# Altium PCB BatteryMaster.PcbDoc
Units mm, origin at the board's own origin, x right, y up, seen from the top; angles counter-clockwise.
Board outline 82.66 x 56.61 mm, 2 copper layers (Top Layer, Bottom Layer); 93 components, 122 nets, 358 pads, 55 vias.
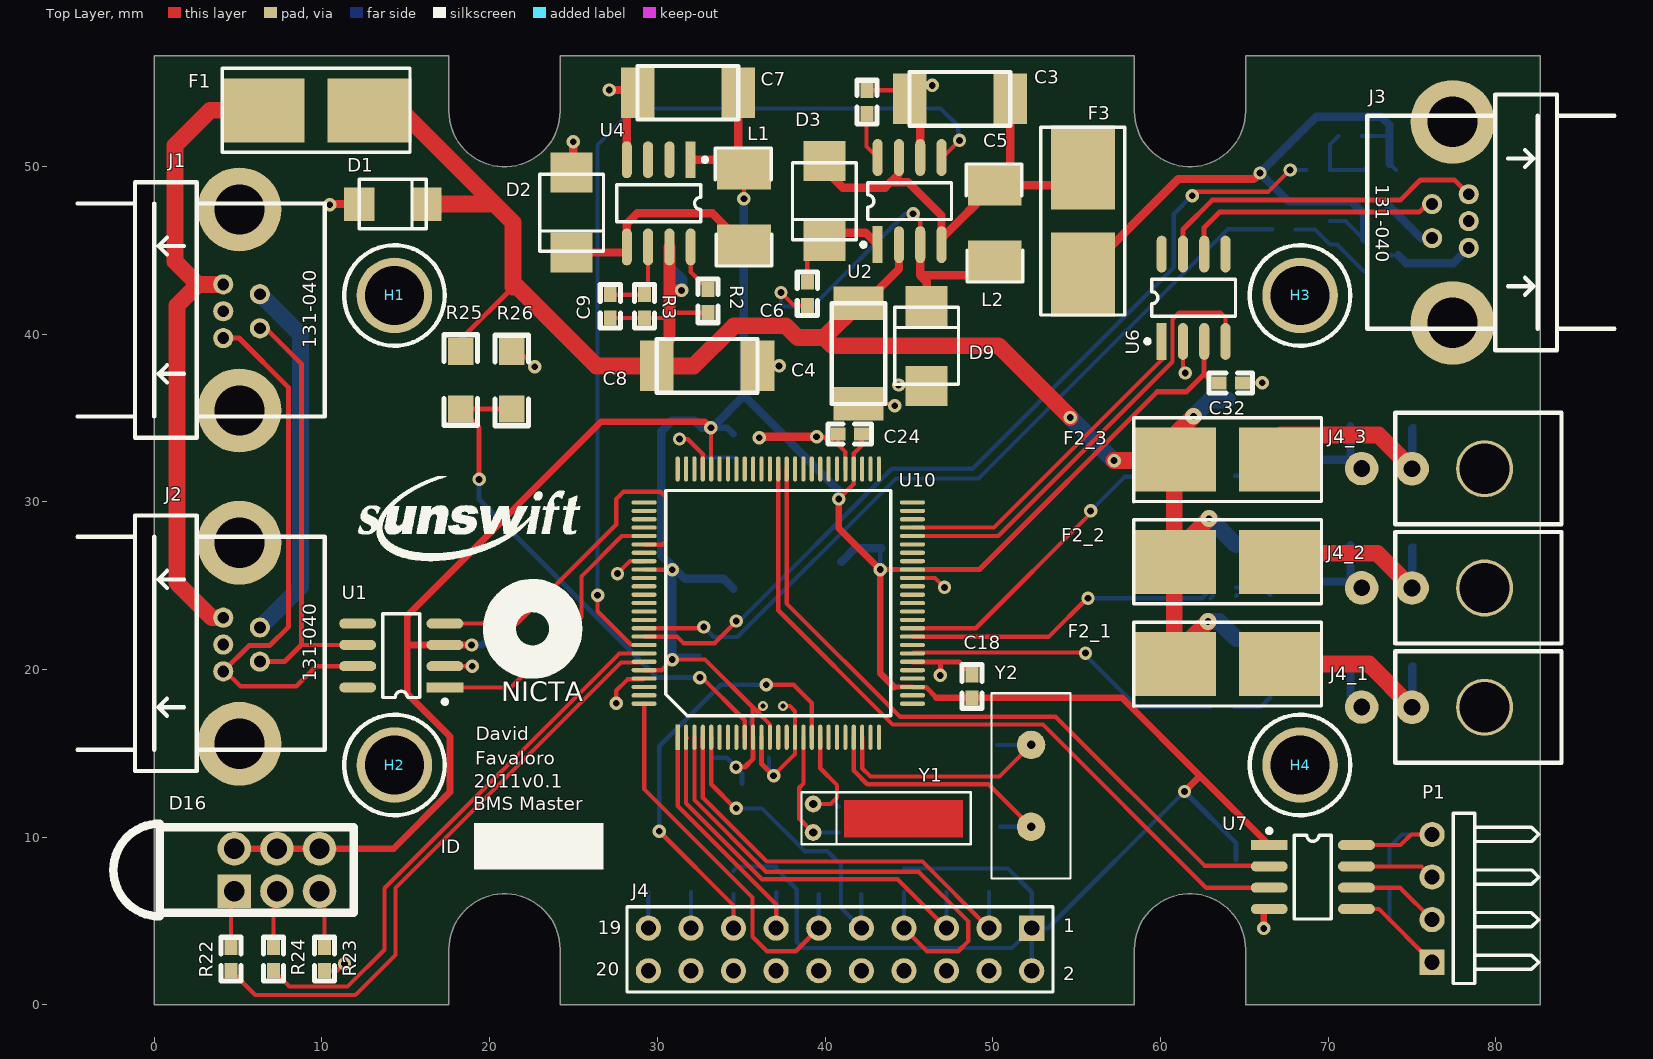
[diagram p0: Top Layer view]
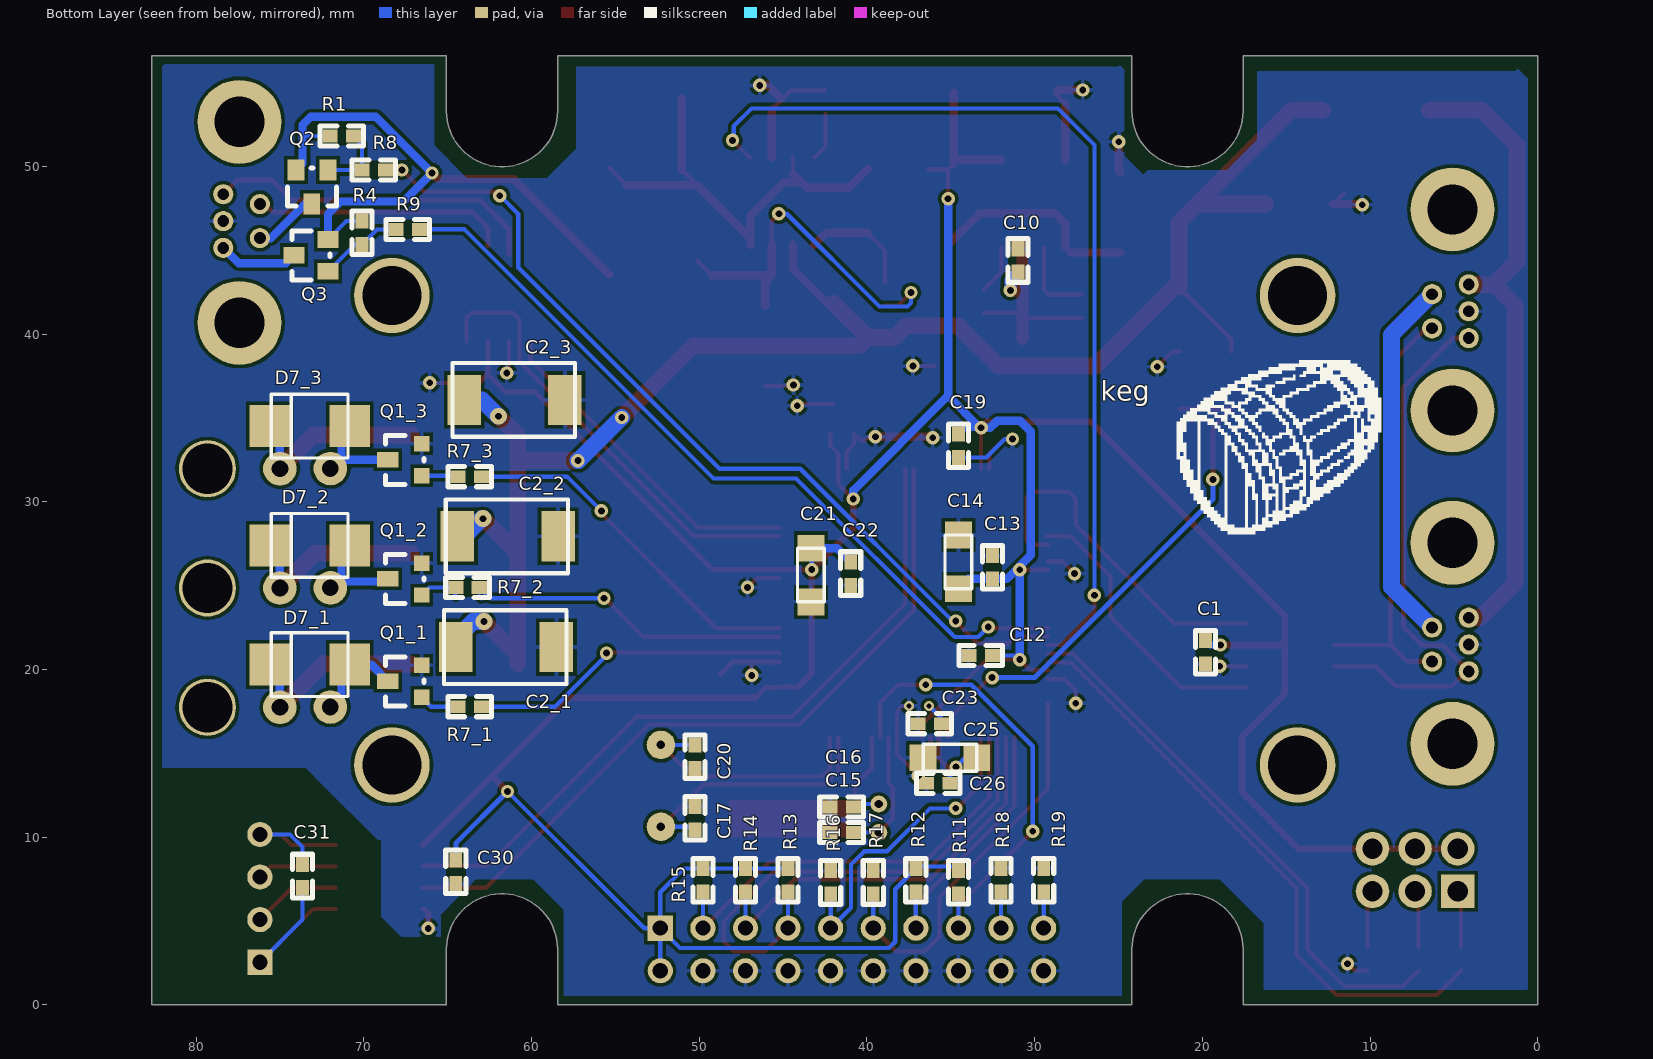
[diagram p1: Bottom Layer view, seen from below]

## Layer stack, top to bottom
Top Layer: signal copper 0.0356
Dielectric: dielectric 0.32, FR-4, Dk 4.8
Bottom Layer: signal copper 0.0356

## Board outline
17.575,0 17.575,3.31 cw(c20.89,3.31) 24.205,3.31 24.205,0 58.445,0 58.445,3.31 cw(c61.76,3.31) 65.075,3.31 65.075,0 65.08,-0.005 82.655,-0.005 82.655,56.605 82.65,56.6 65.075,56.6 65.075,53.29 cw(c61.76,53.29) 58.445,53.29 58.445,56.6 24.205,56.6 24.205,53.29 cw(c20.89,53.29) 17.575,53.29 17.575,56.605 -0.005,56.605 -0.005,-0.005 0,0

## Design rules (kind name [scope] priority, off if disabled: settings)
Clearance [All] p1: gap=0.2
ComponentClearance [All] p1 off: gap=0.254 collisioncheckmode=3 verticalgap=0.254 showdistances=FALSE
HoleSize [All] p1 off: absolutevalues=TRUE maxlimit=2.54 minlimit=0.025 maxpercent=80.000 minpercent=20.000
MinimumSolderMaskSliver [All] p1 off: minsoldermaskwidth=0.254
PolygonConnect [All] p1: connectstyle=Relief reliefconductorwidth=0.254 reliefentries=4 polygonreliefangle="90 Angle"
RoutingVias [All] p1: holewidth=0.2 width=0.4 viastyle="Through Hole" minholewidth=0.2 minwidth=0.4 maxholewidth=0.8 maxwidth=1
SilkToSilkClearance [All] p1 off: silktosilkclearance=0.254
SilkscreenOverComponentPads [All] p1 off: minsilkscreentomaskgap=0.254
SolderMaskExpansion [All] p1: expansion=0.102
TestPointUsage [All] p1: valid=0 allowmultiple=FALSE
Testpoint [All] p1: side=15 testpointundercomponent=TRUE minsize=1.016 maxsize=2.54 preferedsize=1.524 minholesize=0 maxholesize=1.016 preferedholesize=0.813 testpointgrid=0.025 style=1023 order=0123456789
Width [All] p1: maxlimit=1 minlimit=0.254 preferedwidth=0.254
19 further rules are at their usual default settings.

## Classes and differential pairs
channel class Switched_Outputs: 1 2 3
component class "Unisolated CAN": C1 D1 F1 J1 J2 U1
component class U_LPC1768: C12 C13 C14 C15 C16 C17 C18 C19 C20 C21 C22 C23 C24 C25 C26 J4 R11 R12 R13 R14 R15 R16 R17 R18 R19 U10 Y1 Y2
component class U_3V-Switcher-50mA: C7 C8 C9 C10 D2 L1 R2 R3 U4
component class TopLevel: C30 C31 C32 D4 D5 D6 D16 F3 H1 H2 H3 H4 J3 P1 Q2 Q3 R1 R4 R8 R9 R22 R23 R24 R25 R26 U6 U7 Z1
component class 2: C2_2 D3_2 D7_2 F2_2 J4_2 Q1_2 R5_2 R6_2 R7_2
component class 3: C2_3 D3_3 D7_3 F2_3 J4_3 Q1_3 R5_3 R6_3 R7_3
component class 5V-switcher: C3 C4 C5 C6 D3 D9 L2 U2
component class 1: C2_1 D3_1 D7_1 F2_1 J4_1 Q1_1 R5_1 R6_1 R7_1

## Components (designator, comment, footprint, x,y, rotation, side; value= is the part's Value field where it differs from the comment)
C1 "100nF" 0603 19.812,20.32 r90 bottom
C2_1 "100uF 35V" MCCT-CASED 64.516,21.336 r180 bottom (schematic designator C2)
C2_2 "100uF 35V" MCCT-CASED 64.42,27.94 r180 bottom (schematic designator C2)
C2_3 "100uF 35V" MCCT-CASED 64.008,36.068 r180 bottom (schematic designator C2)
C3 "100uF 35V" MCCT-CASEC 51.042,54.025 r180 top
C4 "10uF 35V" MCCT-CASEC 41.994,41.833 r270 top
C5 "3.3nF" 0603 42.502,54.533 r270 top
C6 "100nF" 0603 38.946,41.706 r90 top
C7 "4u7 35V" MCCT-CASEC 34.824,54.388 r180 top
C8 "4u7 35V" MCCT-CASEC 29.972,38.1 r0 top
C9 "1n" 0603 27.197,40.952 r90 top
C10 "100nF" 0603 30.988,43.688 r90 bottom
C12 "100nF" 0603 33.909,20.828 r180 bottom
C13 "100nF" 0603 32.512,25.4 r90 bottom
C14 "10uF" MCCT-CASEA 34.544,26.416 r90 bottom
C15 "18pF" 0603 40.813,10.278 r0 bottom
C16 "18pF" 0603 40.813,11.802 r0 bottom
C17 "18pF" 0603 50.253,10.419 r90 bottom
C18 "100nF" 0603 48.768,18.288 r90 top
C19 "100nF" 0603 34.544,32.639 r90 bottom
C20 "18pF" 0603 50.253,15.499 r270 bottom
C21 "10uF" MCCT-CASEA 43.341,25.631 r270 bottom
C22 "100nF" 0603 40.972,25.016 r90 bottom
C23 "100nF" 0603 35.56,16.764 r0 bottom
C24 "100nF" 0603 40.767,34.036 r0 top
C25 "10uF" MCCT-CASEA 35.052,14.732 r0 bottom
C26 "100nF" 0603 35.052,13.208 r0 bottom
C30 "100nF" 0603 64.516,7.239 r90 bottom
C31 "100nF" 0603 73.66,8.382 r270 bottom
C32 "100nF" 0603 64.897,37.084 r180 top
D1 "12V Transient Suppressor" SMA 14.224,47.752 r0 top
D2 "MBRS130" SMB 24.892,47.244 r270 top
D3 "1N914" SMB 39.962,47.929 r270 top
D7_1 "15V" SMB 73.232,20.284 r0 bottom (schematic designator D7)
D7_2 "15V" SMB 73.232,27.396 r0 bottom (schematic designator D7)
D7_3 "15V" SMB 73.232,34.508 r0 bottom (schematic designator D7)
D9 "MBRS130" SMB 46.058,39.293 r90 top
D16 "1882-2781" LED_TRILEVEL 4.775,6.77 r90 top
F1 "125mA/3A" LITTELFUSE-154 9.652,53.34 r0 top
F2_1 "Fuse" LITTELFUSE-154 64.008,20.32 r0 top (schematic designator F2)
F2_2 "Fuse" LITTELFUSE-154 64.008,26.416 r0 top (schematic designator F2)
F2_3 "Fuse" LITTELFUSE-154 64.008,32.512 r0 top (schematic designator F2)
F3 "125mA/3A" LITTELFUSE-154 55.372,46.736 r90 top
H1 "HOLE" M2.5 14.325,42.3 r0 top
H2 "HOLE" M2.5 14.325,14.3 r0 top
H3 "HOLE" M2.5 68.325,42.3 r0 top
H4 "HOLE" M2.5 68.325,14.3 r0 top
J1 "CON5-S" TRIAD5F 6.3,42.375 r90 top
J2 "CON5-S" TRIAD5F 6.3,22.5 r90 top
J3 "CON5-S" TRIAD5F 76.2,45.72 r270 top
J4 "ARM JTAG" HDR2X10 52.324,4.572 r180 top
J4_1 "CON2" MICROFIT-2 75.008,17.744 r90 top (schematic designator J4)
J4_2 "CON2" MICROFIT-2 75.008,24.856 r90 top (schematic designator J4)
J4_3 "CON2" MICROFIT-2 75.008,31.968 r90 top (schematic designator J4)
L1 "330uH" 1812 35.164,45.325 r90 top
L2 "10uH" 1812 50.122,44.373 r90 top
P1 "Header 4H" HDR1X4H 76.2,2.54 r90 top
Q1_1 "ZXM61N02F" SOT23(3) 66.548,18.339 r90 bottom (schematic designator Q1)
Q1_2 "ZXM61N02F" SOT23(3) 66.548,24.435 r90 bottom (schematic designator Q1)
Q1_3 "ZXM61N02F" SOT23(3) 66.548,31.547 r90 bottom (schematic designator Q1)
Q2 "ZXM61P03F" SOT23-3 72.136,49.784 r0 bottom
Q3 "ZXM61P03F" SOT23-3 72.136,43.739 r90 bottom
R1 "10K" 0603 70.612,51.816 r0 bottom
R2 "100k" 0603 33.02,42.672 r270 top
R3 "1R2" 0603 29.229,40.952 r90 top
R4 "10K" 0603 70.104,45.339 r90 bottom
R7_1 "100R" 0603 62.992,17.78 r0 bottom (schematic designator R7)
R7_2 "100R" 0603 63.119,24.892 r0 bottom (schematic designator R7)
R7_3 "100R" 0603 62.992,31.496 r0 bottom (schematic designator R7)
R8 "100" 0603 68.707,49.784 r0 bottom
R9 "100" 0603 66.675,46.228 r0 bottom
R11 "10k" 0603 34.544,6.604 r90 bottom
R12 "10k" 0603 37.084,6.731 r90 bottom
R13 "10k" 0603 44.704,6.731 r90 bottom
R14 "10k" 0603 47.244,6.731 r90 bottom
R15 "10k" 0603 49.784,6.731 r90 bottom
R16 "10k" 0603 42.164,8.001 r270 bottom
R17 "10k" 0603 39.624,8.001 r270 bottom
R18 "10k" 0603 32.004,8.128 r270 bottom
R19 "10k" 0603 29.464,8.128 r270 bottom
R22 "1K" 0603 4.572,2.032 r90 top
R23 "1K" 0603 7.112,2.032 r90 top
R24 "1K" 0603 10.16,2.032 r90 top
R25 "100k" 1206 18.28,38.958 r270 top
R26 "20K" 1206 21.328,35.529 r90 top
U1 "SN65HVD232" SO8 14.732,20.828 r90 top
U2 "LT1376" SO8 45.042,47.929 r0 top
U4 "LTC1474" SO8 30.084,47.793 r180 top
U6 "SN65HVD232" SO8 61.976,42.164 r0 top
U7 "IL712" SO8 69.088,7.62 r270 top
U10 "LPC1768" QFP100 31.212,15.957 r90 top
Y1 "32.768 KHz" WATCHA 39.289,11.978 r270 top
Y2 "12 MHz" HC49/4H 52.285,7.534 r90 top

## Footprints (in the part's own frame and the unit in brackets; to place one, negate y for a bottom-side part, rotate by r counter-clockwise, add the part's x,y. Pads: shape width x height; smd on the part's side, far side on the other; paste and mask are expansions set on the pad)
0603 [mil]
  rect 35.43x30 smd: 1(0,0) 2(55,0)
  silkscreen extent -24,-24 79,24
1206 [mil]
  rect 62.99x60 smd: 1(0,0) 2(135,0)
  silkscreen extent -39,-39 173,39
1812 [mm]
  rect 2.4x3.2 smd: 1(0,0) 2(4.5,0)
  silkscreen extent -1.27,-1.66 5.77,1.7
HC49/4H [mm]
  round 1.7 hole 0.5: 1(3.085,0) 2(7.965,0)
  silkscreen extent 0,-2.35 11.05,2.35
HDR1X4H [mm] "Connector; Header; 4 Position; Right Angle"
  rect 1.5x1.5 hole 0.9: 1(0,0)
  round 1.5 hole 0.9: 2(2.54,0) 3(5.08,0) 4(7.62,0)
  silkscreen extent -1.27,-6.35 8.89,-1.27
HDR2X10 [mm] "Connector; Header; 10x2 Position"
  rect 1.5x1.5 hole 0.9: 1(0,0)
  round 1.5 hole 0.9: 2(0,2.54) 3(2.54,0) 4(2.54,2.54) 5(5.08,0) 6(5.08,2.54) 7(7.62,0) 8(7.62,2.54) 9(10.16,0) 10(10.16,2.54) 11(12.7,0) 12(12.7,2.54) 13(15.24,0) 14(15.24,2.54) 15(17.78,0) 16(17.78,2.54) 17(20.32,0) 18(20.32,2.54) 19(22.86,0) 20(22.86,2.54)
  silkscreen extent -1.27,-1.27 24.13,3.81
LED_TRILEVEL [mm]
  rect 2x2 hole 1.2: 1(0,0)
  round 2 hole 1.2: 2(0,-2.54) 3(0,-5.08) 4(2.54,-5.08) 5(2.54,-2.54) 6(2.54,0)
  silkscreen extent -1.49,-7.11 4.03,7.21
LITTELFUSE-154 [mm]
  rect 5x3.81 smd: 1(-3.185,0) 2(3.185,0)
  silkscreen extent -5.6,-2.51 5.6,2.5
M2.5 [mm]
  round 4.5 hole 3.5: 1(0,0)
  silkscreen extent -3,-3 3,3
MCCT-CASEA [mm]
  rect 1.6x1.6 smd: 1(-1.6,0) 2(1.6,0)
  silkscreen extent -1.6,-0.8 1.6,0.8
MCCT-CASEC [mm]
  rect 2x3 smd: 1(0,0) 2(6,0)
  silkscreen extent 0,-1.6 6,1.6
MCCT-CASED [mm]
  rect 2x3 smd: 1(0,0) 2(6,0)
  silkscreen extent -0.7,-2.2 6.6,2.2
MICROFIT-2 [mm]
  round 3.4 hole 3: 0(0,-4.32)
  round 2 hole 1: 1(0,0) 2(0.01,3.01)
  silkscreen extent -3.31,-8.91 3.33,1.01
QFP100 [mm]
  rect 1.5x0.25 smd: 1(0,0)
  oval 1.5x0.25 smd: 2(0,-0.5) 3(0,-1) 4(0,-1.5) 5(0,-2) 6(0,-2.5) 7(0,-3) 8(0,-3.5) 9(0,-4) 10(0,-4.5) 11(0,-5) 12(0,-5.5) 13(0,-6) 14(0,-6.5) 15(0,-7) 16(0,-7.5) 17(0,-8) 18(0,-8.5) 19(0,-9) 20(0,-9.5) 21(0,-10) 22(0,-10.5) 23(0,-11) 24(0,-11.5) 25(0,-12) 51(16,-12) 52(16,-11.5) 53(16,-11) 54(16,-10.5) 55(16,-10) 56(16,-9.5) 57(16,-9) 58(16,-8.5) 59(16,-8) 60(16,-7.5) 61(16,-7) 62(16,-6.5) 63(16,-6) 64(16,-5.5) 65(16,-5) 66(16,-4.5) 67(16,-4) 68(16,-3.5) 69(16,-3) 70(16,-2.5) 71(16,-2) 72(16,-1.5) 73(16,-1) 74(16,-0.5) 75(16,0)
  oval 0.25x1.5 smd: 26(2,-14) 27(2.5,-14) 28(3,-14) 29(3.5,-14) 30(4,-14) 31(4.5,-14) 32(5,-14) 33(5.5,-14) 34(6,-14) 35(6.5,-14) 36(7,-14) 37(7.5,-14) 38(8,-14) 39(8.5,-14) 40(9,-14) 41(9.5,-14) 42(10,-14) 43(10.5,-14) 44(11,-14) 45(11.5,-14) 46(12,-14) 47(12.5,-14) 48(13,-14) 49(13.5,-14) 50(14,-14) 76(14,2) 77(13.5,2) 78(13,2) 79(12.5,2) 80(12,2) 81(11.5,2) 82(11,2) 83(10.5,2) 84(10,2) 85(9.5,2) 86(9,2) 87(8.5,2) 88(8,2) 89(7.5,2) 90(7,2) 91(6.5,2) 92(6,2) 93(5.5,2) 94(5,2) 95(4.5,2) 96(4,2) 97(3.5,2) 98(3,2) 99(2.5,2) 100(2,2)
  silkscreen extent 1.28,-12.71 14.71,0.72
SMA [mm]
  rect 1.8x2 smd: A(-2,0) K(2,0)
  silkscreen extent -2,-1.48 2,1.48
SMB [mm]
  rect 2.4x2.5 smd: A(-2.385,0) K(2.385,0)
  silkscreen extent -2.28,-1.9 2.3,1.9
SO8 [mm]
  rect 0.6x2.2 smd: 1(-1.905,-2.6)
  oval 0.6x2.2 smd: 2(-0.635,-2.6) 3(0.635,-2.6) 4(1.905,-2.6) 5(1.905,2.6) 6(0.635,2.6) 7(-0.635,2.6) 8(-1.905,2.6)
  silkscreen extent -2.88,-2.72 2.5,1.1
SOT23(3) [mil]
  rect 36x36 smd: 1(0,0) 2(75,0)
  rect 36x50 smd: 3(38,80)
  silkscreen extent -20,-5 95,85
SOT23-3 [mm]
  rect 1x1.25 smd: 1(0,0) 2(1.905,0) 3(0.965,2.032)
  silkscreen extent -0.51,-0.13 2.41,2.16
TRIAD5F [mm]
  round 5 hole 3: 0(-6.934,1.219) 0(5.055,1.219)
  round 1.2 hole 0.7: 1(0,0) 2(0.584,2.184) 3(-1.016,2.184) 4(-2.616,2.184) 5(-2.032,0)
  silkscreen extent -8.56,-3.86 6.68,10.87
WATCHA [mm]
  round 1 hole 0.5: 1(0,0) 2(1.7,0)
  Top Layer region: -0.25,1.85 2,1.85 2,8.95 -0.25,8.95
  silkscreen extent -0.7,-0.7 2.4,9.4

## Part data
C1 C5 C6 C9 C10 C12 C13 C15 C16 C17 C18 C19 C20 C22 C23 C24 C26 C30 C31 C32: library part CAP, "Capacitor"
C2_1 C2_2 C2_3 C3 C4 C7 C8: library part "Cap Pol3", "Polarized Capacitor (Surface Mount)"
C14 C21 C25: library part "CAP POL3", "Polarized Capacitor (Surface Mount)"
D1 D3 D7_1 D7_2 D7_3: library part DIODE, "Diode"
D2 D9: library part "D SCHOTTKY", "Schottky Diode"
D16: library part LED-TRILEVEL, "Three level LED"
F1 F3: library part FUSE2, "Fuse"
F2_1 F2_2 F2_3: library part FUSE
H1 H2 H3 H4: "Hole"
J1 J2 J3: "Connector, 2 pin, with shield @ S"
J4: library part "Header 10X2", "Header, 10-Pin, Dual row"
J4_1 J4_2 J4_3: "Connector"
L1 L2: library part Inductor, "Inductor"
P1: "Header, 4-Pin, Right Angle"
Q1_1 Q1_2 Q1_3: "1.7A, 20V N-Channel Enhancement mode FET"
Q2 Q3: "1.1A, 30V P-Channel Enhancement mode FET"
R1 R2 R3 R4 R8 R9 R11 R12 R13 R14 R15 R16 R17 R18 R19 R22 R23 R24: library part RES1, "Resistor"
R7_1 R7_2 R7_3 R25 R26: library part RES1
U1 U6: "3.3V CAN Transciever"
U4: "Step-down converter"
U7: "IL712 Optical Isolator"
U10: "NXP Cortex-M3 Microcontroller, 100pin 100MHz"
Y1 Y2: library part CRYSTAL, "Crystal"

## Free pads (board coordinates)
  round 1.981 on Top Overlay mask+0.2: 2(26.353,22.121)

## Via types
v1: diameter 0.8, hole 0.4, Top Layer to Bottom Layer, 46 vias
v2: diameter 1, hole 0.4, Top Layer to Bottom Layer, 3 vias
v3: diameter 0.6, hole 0.3, Top Layer to Bottom Layer, 2 vias
v4: diameter 0.8, hole 0.4, Top Layer to Bottom Layer, tented both sides, 2 vias
v5: diameter 0.8, hole 0.4, Top Layer to Bottom Layer, tented top, 1 vias
v6: diameter 0.8, hole 0.4, Top Layer to Bottom Layer, tented bottom, 1 vias

## Nets (pads, with @x,y where several pads share a name; then routed paths per layer and width w, separated by ;. In a path a pad name is that pad's centre, name@x,y a point inside that pad or via, vN(x,y) a via of type N, cw(c..) or ccw(c..) an arc to the next point about the centre after c; other vN are vias at no path point)
3V3: C1.2 C7.1 C12.2 C13.1 C14.1 C18.1 C19.2 C21.1 C22.2 C23.1 C24.2 C25.1 C26.1 C30.2 C32.2 D16.4 D16.5 D16.6 J4.1 J4.2 L1.2 R11.2 R12.2 R13.2 R14.2 R15.2 U1.3 U4.1 U6.3 U7.1 U10.10 U10.12 U10.28 U10.42 U10.54 U10.71 U10.84 U10.96 | length 264
  Top Layer w0.254: U10.96 30.263,19.957 v1(30.893,20.587) 32.846,20.587 35.955,17.479 ; U10.84@29.224,25.945 v1(30.893,25.945) ; U10.71@33.197,31.972 v1(33.197,34.408) ; L1.2@34.596,50.393 L1.2 ; v1(34.691,14.179) v1@34.733,14.221 ; L1.2@34.824,50.165 L1.2 ; v1(35.164,48.065) L1.2 ; 35.677,17.748 35.677,15.992 U10.10 U10.10@35.698,15.943 ; v3(36.289,17.814) 35.955,17.479 ; L1.2@36.31,49.825 L1.2 ; U10.12 36.712,16.721 35.955,17.479 ; v1(40.813,30.162) 41.712,31.061 U10.54 41.712,32.879 42.196,33.363 42.196,34.004 C24.2
  Top Layer w0.3: v1(34.691,14.179) 35.227,14.179 35.698,14.65 U10.10@35.698,15.943 ; v1(43.286,25.957) U10.42 49.209,25.957 59.81,36.558 61.552,36.558 62.611,37.617 ; 44.116,18.957 U10.28 45.237,18.932 46.034,18.932 46.649,18.317 ; U6.3 62.611,37.617 ; C32.2 63.144,37.084 62.611,37.617
  Top Layer w0.4: D16.6 D16.5 D16.4 14.262,9.31 17.636,12.684 17.636,15.992 15.092,18.536 15.092,23.212 26.658,34.778 32.827,34.778 v1(33.197,34.408) ; 15.116,21.463 U1.3 18.918,21.463 v1(18.922,21.459) ; v1(40.813,30.162) 40.813,28.43 v1(43.286,25.957) 43.286,19.787 44.116,18.957 ; 46.649,18.317 57.696,18.317 62.361,13.652 ; v1(61.433,12.724) 62.361,13.652 ; U7.1 62.361,13.652
  Top Layer w0.5: U4.1 L1.2@34.596,50.393 ; L1.2@34.824,50.165 C7.1
  Bottom Layer w0.254: v1(30.893,20.587) 31.134,20.828 C12.2 ; C25.1 34.138,14.732 v1(34.691,14.179) ; R11.2 34.79,8.247 R12.2@37.084,8.247 ; C23.1 35.56,17.085 v3(36.289,17.814) ; R12.2 38.316,6.896 38.316,3.762 38.684,3.394 51.146,3.394 J4.1 ; v1@43.341,26.012 v1(43.286,25.957) 43.286,27.176 C21.1 ; R13.2 R14.2 R15.2 50.913,8.128 52.324,6.717 J4.1 ; J4.2 J4.1 ; v1(61.433,12.724) 53.281,4.572 J4.1
  Bottom Layer w0.3: v1(34.691,14.179) 35.052,13.818 C26.1 ; v1(61.433,12.724) 64.516,9.641 C30.2
  Bottom Layer w0.4: v1(18.922,21.459) 19.554,21.459 C1.2 ; v1@33.247,34.408 34.172,34.408 C19.2
  Bottom Layer w0.5: v1(30.893,20.587) v1(30.893,25.945) ; C14.1 33.96,25.4 C13.1 31.649,25.4 30.235,26.814 30.235,34.192 30.871,34.828 32.233,34.828 32.653,34.408 v1(33.197,34.408) 33.247,34.408 35.164,36.325 ; v1(35.164,48.065) 35.164,36.325 ; v1(40.813,30.162) 40.813,30.676 35.164,36.325 ; C22.2 41.79,27.231 C21.1
5V: C3.1 D3.A F3.2 L2.2 U2.4 U2.7 | length 27.9
  Top Layer w0.254: U2.7@44.407,49.553 U2.7 ; U2.4 U2.4@46.947,45.698 ; L2.2 L2.2@51.042,49.793 ; F3.2@54.324,48.873 F3.2
  Top Layer w0.5: D3.A@39.962,49.829 41.057,48.734 43.588,48.734 U2.7@44.407,49.553 ; 43.902,49.048 44.972,49.048 46.947,47.073 U2.4 ; U2.4@46.947,45.698 L2.2 F3.2@54.324,48.873 ; L2.2@51.042,49.793 C3.1
5V_FUSED: F3.1 Q2.2 Q3.2 R1.2 R4.2 | length 38.1
  Top Layer w0.5: F3.1 61.064,49.243 65.575,49.243 v1(65.937,49.605)
  Bottom Layer w0.254: R4.2 71.044,46.736 Q3.2 ; R1.2 73.66,51.816 ; Q2.2@73.66,50.165 Q2.2
  Bottom Layer w0.5: Q3.2 72.136,47.149 71.385,47.9 67.642,47.9 v1(65.937,49.605) 69.285,52.953 73.182,52.953 73.66,52.475 73.66,51.816 Q2.2@73.66,50.165
5VBMS_EN: R9.1 U10.91 | length 47.8
  Top Layer w0.254: U10.91 32.693,22.457 v1(32.765,22.529)
  Bottom Layer w0.254: v1(32.765,22.529) 33.365,21.929 34.765,21.929 44.222,31.386 49.144,31.386 64.001,46.243 R9.1@66.66,46.243
"12V MEASURE": R25.2 R26.1 U10.9 | length 31.4
  Top Layer w0.254: v1(32.539,19.514) 32.539,19.646 35.212,16.973 U10.9
  Top Layer w0.3: v4(19.372,31.329) 19.372,34.437 R25.2 R26.1
  Bottom Layer w0.3: v4(19.372,31.329) 19.372,30.136 29.994,19.514 v1(32.539,19.514)
BCAN_H: J3.4 U6.7 | length 20.7
  Top Layer w0.254: J3.4@77.962,48.759 J3.4
  Top Layer w0.3: U6.7 61.341,46.239 63.085,47.983 74.299,47.983 75.51,49.194 77.527,49.194 J3.4
BCAN_L: J3.5 U6.6 | length 15.2
  Top Layer w0.254: J3.5@75.919,47.752 J3.5
  Top Layer w0.3: U6.6@62.611,45.272 62.611,46.348 63.527,47.264 75.431,47.264 J3.5@75.919,47.752
BCAN_RX: U6.4 U10.46 | length 27.2
  Top Layer w0.254: U10.46 50.326,27.957 60.714,38.345 60.714,40.868 61.115,41.269 63.585,41.269 63.881,40.973 U6.4
BCAN_TX: U6.1 U10.47 | length 20.1
  Top Layer w0.254: U10.47 50.07,28.457 60.071,38.458 U6.1
CAN+5V: J1.1 J2.1 | length 21.9
  Bottom Layer w1: J2.1 8.717,24.917 8.717,39.958 J1.1
CAN+12_1: C2_1.1 C2_2.1 C2_3.1 C4.1 C8.1 C9.1 C10.1 D1.K F1.2 F2_1.1 F2_2.1 F2_3.1 R2.2 R3.1 R25.1 U2.2 U4.7 | length 122.6
  Top Layer w0.254: R25.1@18.28,39.537 R25.1 R25.1@18.28,39.687 ; C9.1 R3.1 30.718,40.952 ; U4.7@30.513,44.987 U4.7 ; 30.766,41.275 R2.2 ; C4.1 C4.1@42.359,41.833
  Top Layer w0.3: R25.1@18.28,39.687 21.401,42.808
  Top Layer w0.5: C4.1@42.359,41.833 44.407,43.881 U2.2
  Top Layer w0.7: 30.719,39.682 30.719,42.599 ; U4.7 30.719,42.599 ; v1(31.447,42.599) 30.719,42.599
  Top Layer w1: F1.2@13.271,53.34 F1.2 ; F1.2@14.446,53.34 F1.2 ; D1.K 20.295,47.752 ; 20.457,47.59 20.295,47.752 ; 21.401,42.808 21.401,43.066 ; C4.1 39.948,39.787 ; v1(54.625,35.021) 50.341,39.305 40.43,39.305 39.948,39.787 ; v1(57.235,32.455) 60.766,32.455 F2_3.1 ; v2(61.973,35.091) 60.823,33.941 F2_3.1 ; v2(62.835,22.856) 62.835,22.847 60.823,20.835 F2_1.1 F2_2.1 F2_2.1@60.823,26.924 ; v2(62.893,28.994) F2_2.1@60.823,26.924 ; F1.2 14.707,53.34 20.295,47.752 ; 20.295,47.752 21.401,46.646 21.401,43.066 ; 21.401,43.066 26.367,38.1 C8.1 32.168,38.1 34.559,40.491 37.663,40.491 38.367,39.787 39.948,39.787 ; F2_2.1@60.823,26.924 F2_3.1
  Bottom Layer w0.7: C10.1 31.447,43.229 v1(31.447,42.599)
  Bottom Layer w1: v1(54.625,35.021) 57.191,32.455 v1(57.235,32.455) ; v2(61.973,35.091) 62.95,36.068 C2_3.1 ; v2(62.835,22.856) 63.504,22.856 C2_1.1@64.516,21.844 ; v2(62.893,28.994) 62.954,28.994 C2_2.1@64.516,27.432
CAN_H: J1.4 J2.4 U1.7 | length 33.3
  Top Layer w0.254: J2.4 4.256,19.884 5.143,18.997 8.468,18.997 9.664,20.193 U1.7
  Top Layer w0.3: J2.4 5.65,21.418 6.877,21.418 8.013,22.554 8.013,36.806 5.06,39.759 J1.4
CAN_L: J1.5 J2.5 U1.6 | length 26.4
  Top Layer w0.254: J1.5 J1.5@6.649,40.343 ; 8.769,21.463 U1.6
  Top Layer w0.3: J2.5 7.774,20.468 8.769,21.463 8.769,38.223 J1.5@6.649,40.343
CANGND: C1.1 C2_1.2 C2_2.2 C2_3.2 C3.2 C4.2 C5.1 C7.2 C8.2 C10.2 C12.1 C13.2 C14.2 C15.2 C16.2 C17.2 C18.2 C19.1 C20.2 C21.2 C22.1 C23.2 C24.1 C25.2 C26.2 C30.1 C32.1 D1.A D2.A D9.A J1.3 J2.3 J3.3 J4.4 J4.6 J4.8 J4.10 J4.12 J4.14 J4.16 J4.18 J4.20 Q1_1.2 Q1_2.2 Q1_3.2 R16.1 R17.1 R18.1 R19.1 R24.1 R26.2 U1.2 U2.6 U4.4 U6.2 U7.4 U10.11 U10.15 U10.31 U10.41 U10.55 U10.72 U10.83 U10.97 | length 67.5
  Top Layer w0.254: R24.1 10.891,2.032 11.308,2.449 v5(11.346,2.449) ; v1(10.471,47.703) v1@10.52,47.752 ; D1.A@11.553,48.423 D1.A ; U1.2 v4(18.957,20.193) ; R26.2 21.782,38.958 v1(22.697,38.043) ; v1(27.55,17.992) 27.55,18.737 28.222,19.409 29.164,19.409 U10.97 ; v1(27.627,25.717) 28.367,26.457 U10.83 ; U4.4@28.179,50.315 U4.4@28.25,50.386 ; C7.2@28.179,53.743 C7.2 C7.2@28.659,54.553 ; v1(31.32,33.743) 31.815,33.743 32.712,32.846 U10.72 ; C8.2 37.256,38.1 v1(37.259,38.097) ; v1(36.081,33.821) v1@36.132,33.872 ; v1(36.93,13.667) 38.212,14.949 U10.15 38.212,17.511 37.909,17.814 v3(37.495,17.814) ; v1(39.496,33.872) 39.908,33.872 40.137,33.643 40.374,33.643 C24.1 40.767,33.412 41.212,32.967 U10.55 ; C4.2 44.047,35.833 v1(44.154,35.726) ; C5.1 44.534,54.533 C3.2 ; v1(44.385,36.959) 44.436,36.908 D9.A ; C3.2@45.103,54.025 C3.2 ; U10.41 46.55,25.457 47.117,24.89 v1(47.124,24.89) ; C3.2@45.677,53.39 C3.2 ; C3.2@45.934,54.856 46.369,54.856 v1(46.4,54.825) ; v1(46.873,19.642) v1@46.992,19.761 ; U6.2 61.341,37.735 61.399,37.677 v1(61.475,37.677) ; C32.1 66.07,37.084 v1(66.074,37.088) ; U7.4@66.156,5.475 66.396,5.715 U7.4
  Top Layer w0.3: U10.11 36.212,14.385 v1(36.93,13.667) ; U10.31 46.873,20.457 ; v1(46.873,19.642) 46.873,20.457 ; C18.2 47.996,20.457 46.873,20.457
  Top Layer w0.4: v1(66.156,4.558) U7.4@66.156,5.475
  Top Layer w0.5: v1@10.52,47.752 D1.A ; D2.A 24.991,49.728 v1(24.991,51.468) ; v1(27.135,54.553) C7.2@28.659,54.553 ; U4.4 C7.2@28.179,53.743 ; v1@36.132,33.872 v1(39.496,33.872) ; C3.2@45.103,54.025 C3.2@45.934,54.856 ; U2.6 C3.2@45.677,53.39
  Bottom Layer w0.254: v1(31.32,33.743) 31.783,33.743 32.887,32.639 C19.1 ; C25.2 36.652,13.945 v1(36.93,13.667) ; v1(66.156,4.558) v1@66.156,4.567
CCAN_RX: U1.4 U10.81 | length 21.4
  Top Layer w0.254: U1.4 21.65,22.733 27.553,28.636 27.553,30.169 27.978,30.594 30.18,30.594 30.487,30.287 30.487,27.638 30.292,27.443 29.226,27.443 U10.81
CCAN_TX: U1.1 U10.80 | length 17
  Top Layer w0.254: U1.1 21.258,18.923 25.474,23.139 25.474,25.552 27.879,27.957 U10.80
DBGACK: J4.19 R19.2 | length 2.2
  Bottom Layer w0.254: J4.19 R19.2
DBGRQ: J4.17 R18.2 | length 2.2
  Bottom Layer w0.254: J4.17 R18.2
INTERRUPT: R8.1 U10.92 | length 53.5
  Top Layer w0.254: U10.92 31.175,21.957 31.565,21.567 33.425,21.567 34.699,22.841 v1(34.699,22.891) ; v1(61.892,48.254) 62.129,48.491 66.436,48.491 v1(67.729,49.784) v1@67.476,49.784
  Bottom Layer w0.254: v1(34.699,22.891) 34.902,22.891 43.977,31.966 48.797,31.966 60.789,43.958 60.789,47.151 v1(61.892,48.254) ; v1(67.729,49.784) R8.1
ISO3V3: C31.1 P1.4 U7.8 | length 8.7
  Top Layer w0.254: U7.8 74.319,9.525 74.954,10.16 P1.4
  Bottom Layer w0.254: C31.1 73.66,9.411 74.409,10.16 P1.4
ISO_RX: P1.2 U7.6 | length 5.3
  Top Layer w0.254: U7.6 74.295,6.985 P1.2
ISO_TX: P1.3 U7.7 | length 4.8
  Top Layer w0.254: U7.7 75.565,8.255 P1.3
ISOGND: C31.2 P1.1 U7.5 | length 11.3
  Top Layer w0.254: U7.5 73.025,5.715 P1.1
  Bottom Layer w0.254: C31.2 73.66,5.08 P1.1
LEDRED: R23.1 U10.94 | length 32.9
  Top Layer w0.254: R23.1 8.057,1.087 11.525,1.087 13.727,3.289 13.727,6.948 27.736,20.957 U10.94
LEDYLW: R22.1 U10.95 | length 35.8
  Top Layer w0.254: R22.1 6.019,0.585 11.994,0.585 14.383,2.974 14.383,6.962 27.832,20.411 29.166,20.411 U10.95
NetC5_2: C5.2 U2.8 | length 2.9
  Top Layer w0.254: C5.2@42.476,53.11 42.476,51.19 U2.8
NetC6_1: C6.1 D9.K L2.1 U2.3 | length 23.4
  Top Layer w0.254: v1(37.374,42.477) 38.145,41.706 C6.1 ; v1(45.249,47.169) 45.677,46.741 U2.3 ; L2.1@49.25,43.501 L2.1
  Top Layer w0.5: U2.3 45.677,43.501 ; D9.K 46.058,43.12 45.677,43.501 ; L2.1@49.25,43.501 45.677,43.501
  Bottom Layer w0.254: v1(37.374,42.477) 37.374,41.847 37.582,41.639 39.251,41.639 44.781,47.169 v1(45.249,47.169)
NetC6_2: C6.2 D3.K U2.1 | length 6.8
  Top Layer w0.254: C6.2 38.946,45.013 D3.K@39.962,46.029
  Top Layer w0.5: D3.K@39.962,46.029 42.437,46.029 U2.1
NetC9_2: C9.2 R3.2 U4.6 | length 5
  Top Layer w0.254: C9.2 R3.2 29.229,42.44 29.449,42.66 U4.6
NetD2_K: D2.K L1.1 U4.5 | length 12.8
  Top Layer w0.254: 27.845,44.859 U4.5
  Top Layer w0.5: D2.K 27.845,44.859 ; U4.5 28.179,46.581 28.797,47.199 33.29,47.199 L1.1
NetD7_1_A: D7_1.A J4_1.2 Q1_1.3 | length 6
  Bottom Layer w0.254: 69.56,20.284 D7_1.A@71.332,20.284 ; J4_1.2@71.332,18.42 J4_1.2
  Bottom Layer w0.5: Q1_1.3 69.56,20.284 ; J4_1.2@71.332,18.42 D7_1.A@71.332,20.284
NetD7_1_K: D7_1.K F2_1.2 J4_1.1 | length 11.5
  Top Layer w1: F2_1.2 72.432,20.32 J4_1.1
  Bottom Layer w0.254: D7_1.K@75.008,20.16 D7_1.K@75.132,20.284
  Bottom Layer w0.5: J4_1.1 D7_1.K@75.008,20.16
NetD7_2_A: D7_2.A J4_2.2 Q1_2.3 | length 4.8
  Bottom Layer w0.254: Q1_2.3 Q1_2.3@68.734,25.246 ; 71.046,25.246 J4_2.2@71.332,25.532
  Bottom Layer w0.5: Q1_2.3@68.734,25.246 71.046,25.246 ; J4_2.2@71.332,25.532 D7_2.A@71.332,27.396
NetD7_2_K: D7_2.K F2_2.2 J4_2.1 | length 11.3
  Top Layer w1: F2_2.2@67.193,26.924 72.94,26.924 J4_2.1
  Bottom Layer w0.254: D7_2.K@75.008,27.272 D7_2.K@75.132,27.396
  Bottom Layer w0.5: J4_2.1 D7_2.K@75.008,27.272
NetD7_3_A: D7_3.A J4_3.2 Q1_3.3 | length 5.5
  Bottom Layer w0.254: J4_3.2@71.464,32.512 J4_3.2
  Bottom Layer w0.5: Q1_3.3 J4_3.2@71.464,32.512 ; J4_3.2@71.332,32.644 D7_3.A@71.332,34.508
NetD7_3_K: D7_3.K F2_3.2 J4_3.1 | length 11.2
  Top Layer w1: F2_3.2@67.193,33.975 73.001,33.975 J4_3.1
  Bottom Layer w0.254: D7_3.K@75.008,34.384 D7_3.K@75.132,34.508
  Bottom Layer w0.5: J4_3.1 D7_3.K@75.008,34.384
NetD16_1: D16.1 R22.2 | length 3.4
  Top Layer w0.254: R22.2 4.572,6.567 D16.1
NetD16_2: D16.2 R23.2 | length 3.4
  Top Layer w0.254: R23.2 7.112,6.567 D16.2
NetD16_3: D16.3 R24.2 | length 3.5
  Top Layer w0.254: D16.3 10.16,6.465 R24.2
NetF1_1: F1.1 J1.2 J2.2 | length 38.4
  Top Layer w1: J2.2 4.119,23.081 3.434,23.081 1.35,25.165 1.35,41.714 2.595,42.959 ; J1.2 2.595,42.959 ; F1.1 3.333,53.34 1.242,51.249 1.242,44.312 2.595,42.959
NetJ3_1: J3.1 Q2.3 | length 3.9
  Bottom Layer w0.254: Q2.3 Q2.3@73.512,47.752
  Bottom Layer w0.5: Q2.3@73.512,47.752 75.544,45.72 J3.1
NetJ3_2: J3.2 Q3.3 | length 4.9
  Bottom Layer w0.254: Q3.3@73.66,44.704 Q3.3@73.808,44.704
  Bottom Layer w0.5: Q3.3 74.646,44.226 77.475,44.226 J3.2
NetQ1_1_1: Q1_1.1 R7_1.2 | length 2.4
  Bottom Layer w0.254: R7_1.2 65.989,17.78 Q1_1.1
NetQ1_2_1: Q1_2.1 R7_2.2 | length 2.3
  Bottom Layer w0.254: 64.516,24.384 64.567,24.435 ; R7_2.2 66.091,24.892 Q1_2.1
NetQ1_3_1: Q1_3.1 R7_3.2 | length 2.1
  Bottom Layer w0.254: R7_3.2@64.44,31.547 Q1_3.1
NetQ2_1: Q2.1 R1.1 R8.2 | length 4.5
  Bottom Layer w0.254: R1.1 70.104,51.308 R8.2 Q2.1 Q2.1@72.263,49.911
NetQ3_1: Q3.1 R4.1 R9.2 | length 5.1
  Bottom Layer w0.254: R9.2 69.215,46.228 R4.1 70.536,45.339 Q3.1
NetR2_1: R2.1 U4.8 | length 2.9
  Top Layer w0.254: U4.8 31.989,43.703 R2.1
NetU10_6: U10.6
NetU10_7: U10.7
NetU10_8: U10.8
NetU10_14: U10.14
NetU10_19: U10.19
NetU10_20: U10.20
NetU10_21: U10.21
NetU10_24: U10.24
NetU10_25: U10.25
NetU10_26: U10.26
NetU10_27: U10.27
NetU10_29: U10.29
NetU10_30: U10.30
NetU10_33: U10.33
NetU10_36: U10.36
NetU10_37: U10.37
NetU10_38: U10.38
NetU10_39: U10.39
NetU10_40: U10.40
NetU10_43: U10.43
NetU10_44: U10.44
NetU10_45: U10.45
NetU10_48: U10.48
NetU10_49: U10.49
NetU10_50: U10.50
NetU10_51: U10.51
NetU10_52: U10.52
NetU10_53: U10.53
NetU10_56: U10.56
NetU10_57: U10.57
NetU10_58: U10.58
NetU10_59: U10.59
NetU10_60: U10.60
NetU10_61: U10.61
NetU10_64: U10.64
NetU10_65: U10.65
NetU10_66: U10.66
NetU10_67: U10.67
NetU10_68: U10.68
NetU10_69: U10.69
NetU10_70: U10.70
NetU10_73: U10.73
NetU10_74: U10.74
NetU10_75: U10.75
NetU10_76: U10.76
NetU10_77: U10.77
NetU10_78: U10.78
NetU10_79: U10.79
NetU10_82: U10.82
NetU10_85: U10.85
NetU10_86: U10.86
NetU10_87: U10.87
NetU10_88: U10.88
NetU10_89: U10.89
NetU10_90: U10.90
NetU10_98: U10.98
NetU10_99: U10.99
PWM1: R7_1.1 U10.32 | length 19.2
  Top Layer w0.254: U10.32 45.26,21.005 55.502,21.005 v1(55.532,20.975)
  Bottom Layer w0.254: v1(55.532,20.975) 55.532,20.85 58.602,17.78 R7_1.1
PWM2: R7_2.1 U10.34 | length 19.3
  Top Layer w0.254: U10.34 53.346,21.957 55.632,24.243 v1(55.682,24.243)
  Bottom Layer w0.254: v1(55.682,24.243) 62.47,24.243 R7_2.1 ; 62.978,24.243 63.119,24.384
PWM3: R7_3.1 U10.35 | length 21.7
  Top Layer w0.254: U10.35 48.988,22.457 55.884,29.353 55.884,29.401 v1(55.833,29.452)
  Bottom Layer w0.254: v1(55.833,29.452) 57.877,31.496 R7_3.1
RST: J4.15 R11.1 U10.17 | length 27.8
  Top Layer w0.254: v1(30.11,10.348) 34.544,5.914 J4.15 ; v1(36.497,19.089) 38.129,19.089 39.212,18.006 U10.17
  Bottom Layer w0.254: v1(30.11,10.348) 30.11,15.418 33.781,19.089 v1(36.497,19.089) ; J4.15 R11.1
RTCK: J4.11 R17.2 U10.100 | length 23.5
  Top Layer w0.254: U10.100 29.212,12.865 35.679,6.398 35.679,4.065 36.544,3.2 38.252,3.2 J4.11
  Bottom Layer w0.254: J4.11 R17.2
RTCX1: C15.1 U10.16 Y1.2 | length 7.6
  Top Layer w0.254: U10.16 38.712,13.192 38.462,12.942 38.462,11.105 Y1.2
  Bottom Layer w0.254: Y1.2 C15.1
RTCX2: C16.1 U10.18 Y1.1 | length 7.2
  Top Layer w0.254: Y1.1 40.327,11.978 40.719,12.37 40.719,13.102 39.712,14.109 U10.18
  Bottom Layer w0.254: Y1.1 40.637,11.978 C16.1
RUN: U2.5 U10.93 | length 56.6
  Top Layer w0.254: v1(26.436,24.432) 26.436,23.469 28.448,21.457 U10.93 ; U2.5 47.002,50.529 v1(48.017,51.544)
  Bottom Layer w0.254: v1(26.436,24.432) 26.436,51.279 28.609,53.452 46.884,53.452 47.949,52.387 47.949,51.612 v1(48.017,51.544)
RX: U7.3 U10.63 | length 44.6
  Top Layer w0.254: U10.63 37.212,23.53 44.031,16.711 52.999,16.711 62.725,6.985 U7.3
TCK: J4.9 R16.2 U10.5 | length 19.4
  Top Layer w0.254: U10.5@33.26,15.909 U10.5 33.212,13.151 34.648,11.715 v6(34.712,11.715) ; J4.9 J4.9@42.164,5.057
  Bottom Layer w0.254: v6(34.712,11.715) 36.244,11.715 38.796,9.163 40.155,9.163 40.946,8.372 40.946,5.79 J4.9 R16.2
TDI: J4.5 R14.1 U10.2 | length 24.8
  Top Layer w0.254: U10.2@31.758,15.911 U10.2 31.712,12.02 36.246,7.486 44.33,7.486 J4.5
  Bottom Layer w0.254: J4.5 R14.1
TDO: J4.13 R12.1 U10.1 | length 16
  Top Layer w0.254: U10.1 31.212,11.873 37.084,6.001 J4.13
  Bottom Layer w0.254: J4.13 R12.1
TMS: J4.7 R13.1 U10.3 | length 31.1
  Top Layer w0.254: U10.3 32.212,12.212 36.484,7.94 45.574,7.94 48.546,4.968 48.546,3.801 47.945,3.2 46.076,3.2 J4.7
  Bottom Layer w0.254: J4.7 R13.1
TRST: J4.3 R15.1 U10.4 | length 26.1
  Top Layer w0.254: U10.4 32.712,12.355 36.525,8.542 45.814,8.542 J4.3
  Bottom Layer w0.254: J4.3 R15.1
TX: U7.2 U10.62 | length 43.3
  Top Layer w0.254: U10.62 37.712,23.938 44.474,17.176 53.746,17.176 62.623,8.299 66.444,8.299 U7.2
XTAL1: C17.1 U10.22 Y2.1 | length 15.8
  Top Layer w0.254: U10.22 41.712,13.964 42.519,13.157 49.747,13.157 Y2.1
  Bottom Layer w0.254: C17.1@50.453,10.619 Y2.1
XTAL2: C20.1 U10.23 Y2.2 | length 14.9
  Top Layer w0.254: U10.23 42.212,14.106 42.707,13.611 50.397,13.611 Y2.2
  Bottom Layer w0.254: C20.1 Y2.2
pads on no net: H1.1 H2.1 H3.1 H4.1 J1.0 J2.0 J3.0 J4_1.0 J4_2.0 J4_3.0 U1.5 U1.8 U4.2 U4.3 U6.5 U6.8 U10.13

## Polygon pours and split planes (outlines as drawn)
CANGND on Bottom Layer "GND-PLANE" (solid, pour order 1000): 65.412,4.048 67.765,4.048 67.832,4.115 68.975,5.258 68.975,9.83 69.177,9.83 72.471,13.124 73.479,14.132 82.018,14.132 82.018,55.95 81.951,56.017 81.884,56.084 65.815,56.084 65.815,51.243 63.933,49.361 63.866,49.294 59.159,49.294 59.092,49.294 57.546,50.84 57.344,51.042 57.344,55.95 25.006,55.95 24.939,56.017 24.67,55.748 24.67,50.638 24.669,50.638 23.527,49.496 23.259,49.764 18.418,49.764 18.418,49.899 17.006,51.311 16.737,51.58 16.737,55.681 1.341,55.681 1.207,55.815 0.602,55.21 0.602,44.588 0.602,0.955 0.669,0.888 16.334,0.888 16.334,4.855 18.888,7.409 18.955,7.476 23.258,7.476 23.46,7.476 24.737,6.199 24.805,6.131 24.805,0.552 58.017,0.552 58.084,0.619 58.084,5.325 58.084,5.661 59.899,7.476 63.261,7.476 63.328,7.476 65.479,5.325 65.412,5.258 65.412,4.048

## Silkscreen, mask and mechanical layers (free items; w line width, h text height)
Top Overlay:
  drawing of 1661 lines, arcs and shapes, not listed
  text "NICTA" at 20.683,17.727 h2
  text "David" at 19.175,15.763 h0.8
  text "Favaloro" at 19.13,14.327 h0.8
  text "2011v0.1" at 19.04,12.935 h0.8
  text "BMS Master" at 19.024,11.603 h0.8
  text "ID" at 17.079,9.051 h0.8
Bottom Overlay:
  region: 137 vertices and 55 holes, not listed, extent 9.341,28.062 21.533,38.425
  text "keg" at 26.054,35.631 h2
Mechanical 1:
  circle w0.254: c14.325,14.3 r1.602
  circle w0.254: c14.325,42.3 r1.602
  circle w0.254: c68.325,42.3 r1.602
  circle w0.254: c68.325,14.3 r1.602
  lines w0.254: -0.005,-0.005 -0.005,56.605 17.575,56.605 17.575,53.295 ; 0,0 17.575,0 17.575,3.31 cw(c20.89,3.31) 24.205,3.31 24.205,0 58.445,0 58.445,3.31 cw(c61.76,3.31) 65.075,3.31 65.075,0 ; 17.575,53.29 ccw(c20.89,53.29) 24.205,53.29 24.205,56.6 58.445,56.6 58.445,53.29 ccw(c61.76,53.29) 65.075,53.29 65.075,56.6 82.65,56.6 ; 65.08,-0.005 82.655,-0.005 82.655,56.605

## Text inside footprints (layer, text, board x,y; h text height)
J1: Top Overlay "131-040" at 9.653,39.149 h0.8 r90
J2: Top Overlay "131-040" at 9.653,19.274 h0.8 r90
J3: Top Overlay "131-040" at 72.847,48.946 h0.8 r270
J4: Top Overlay "2" at 54.215,1.478 h0.8; Top Overlay "1" at 54.215,4.315 h0.8; Top Overlay "19" at 26.435,4.208 h0.8; Top Overlay "20" at 26.328,1.745 h0.8